# Altium PCB Feeder.PcbDoc
Units mm, origin at the board's own origin, x right, y up, seen from the top; angles counter-clockwise.
Board outline 70 x 78.74 mm, 2 copper layers (Top Layer, Bottom Layer); 132 components, 114 nets, 414 pads, 126 vias.
Unrouted connection lines stored in the file: 4.
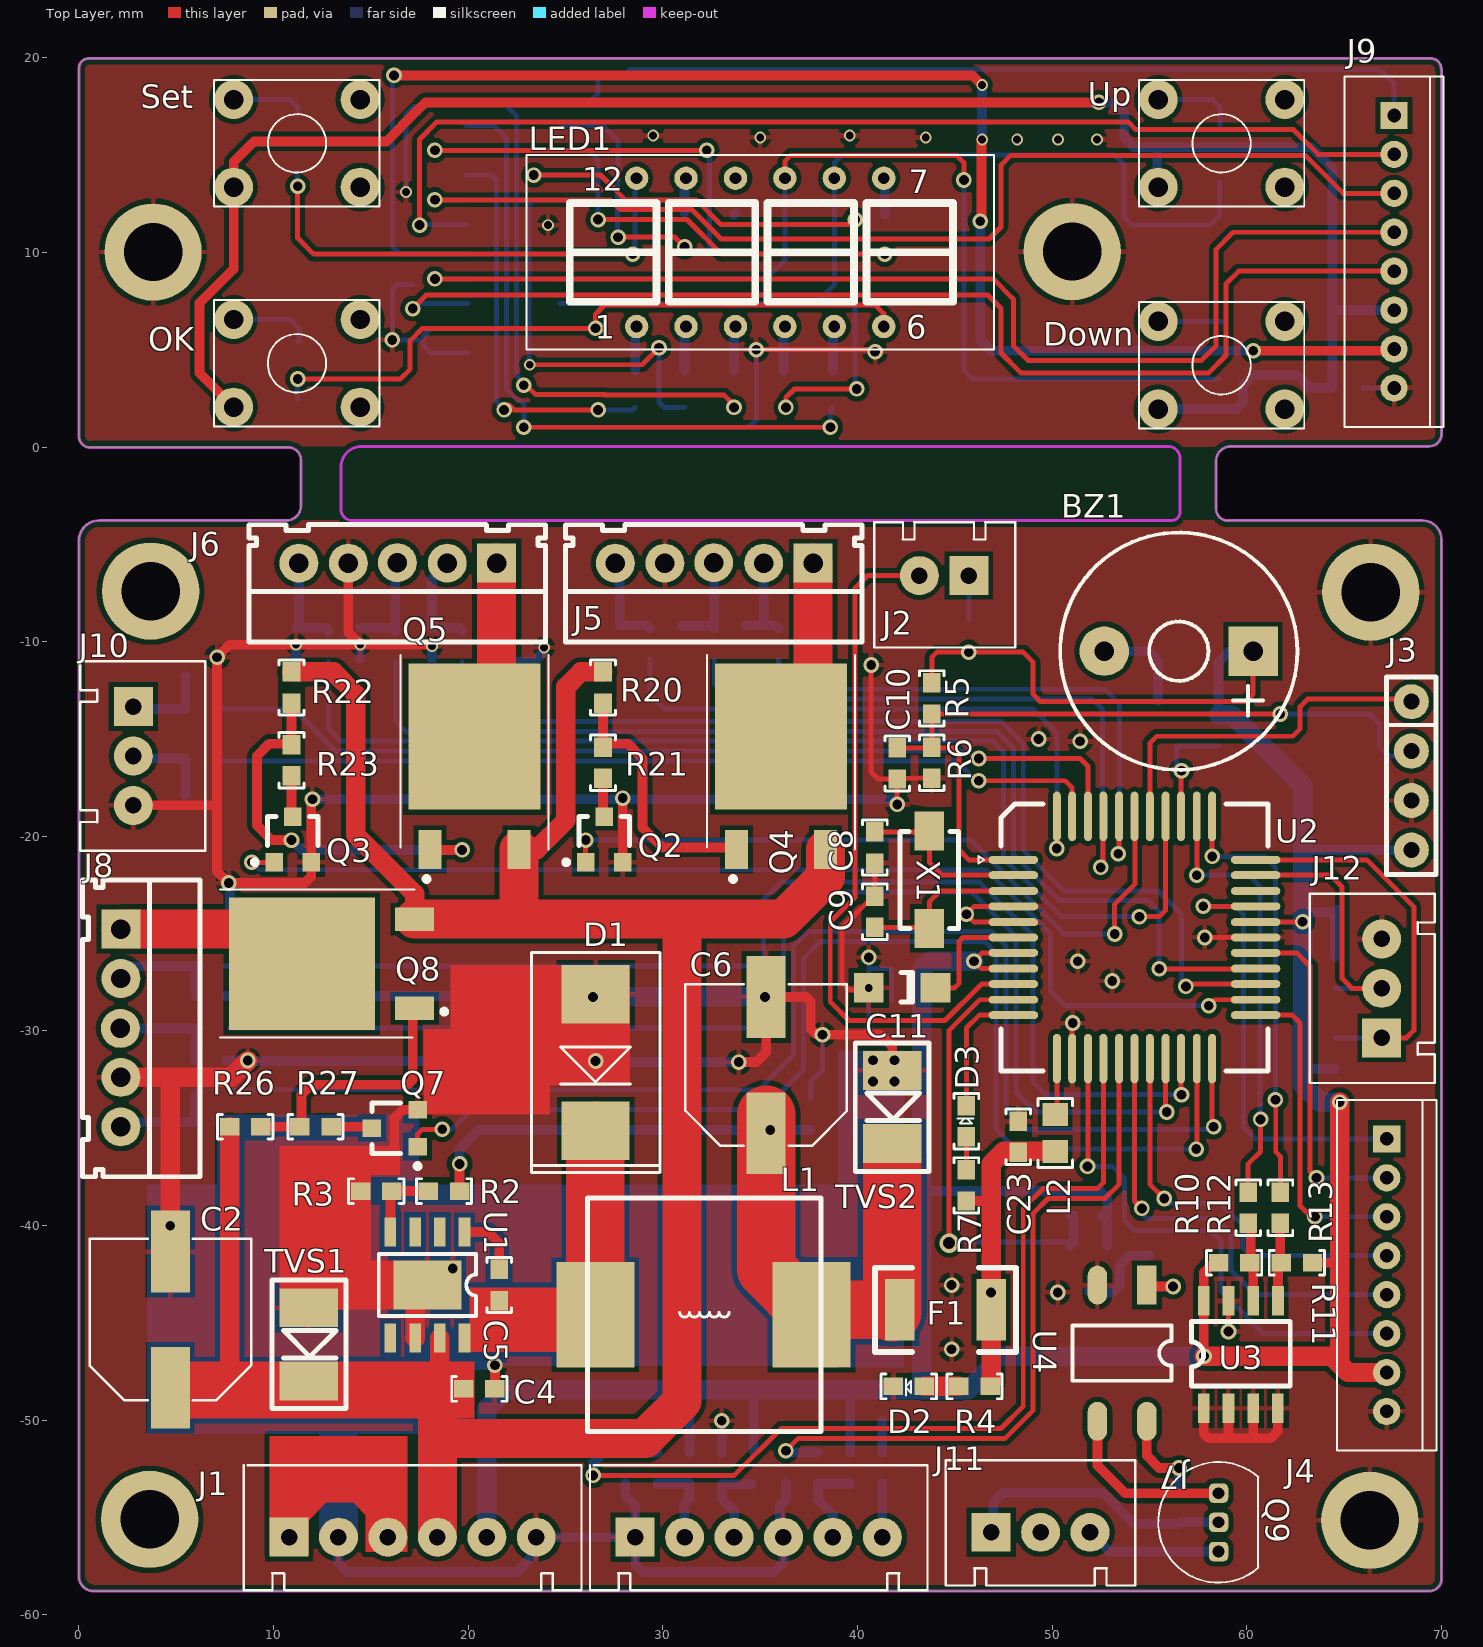
[diagram p0: Top Layer view]
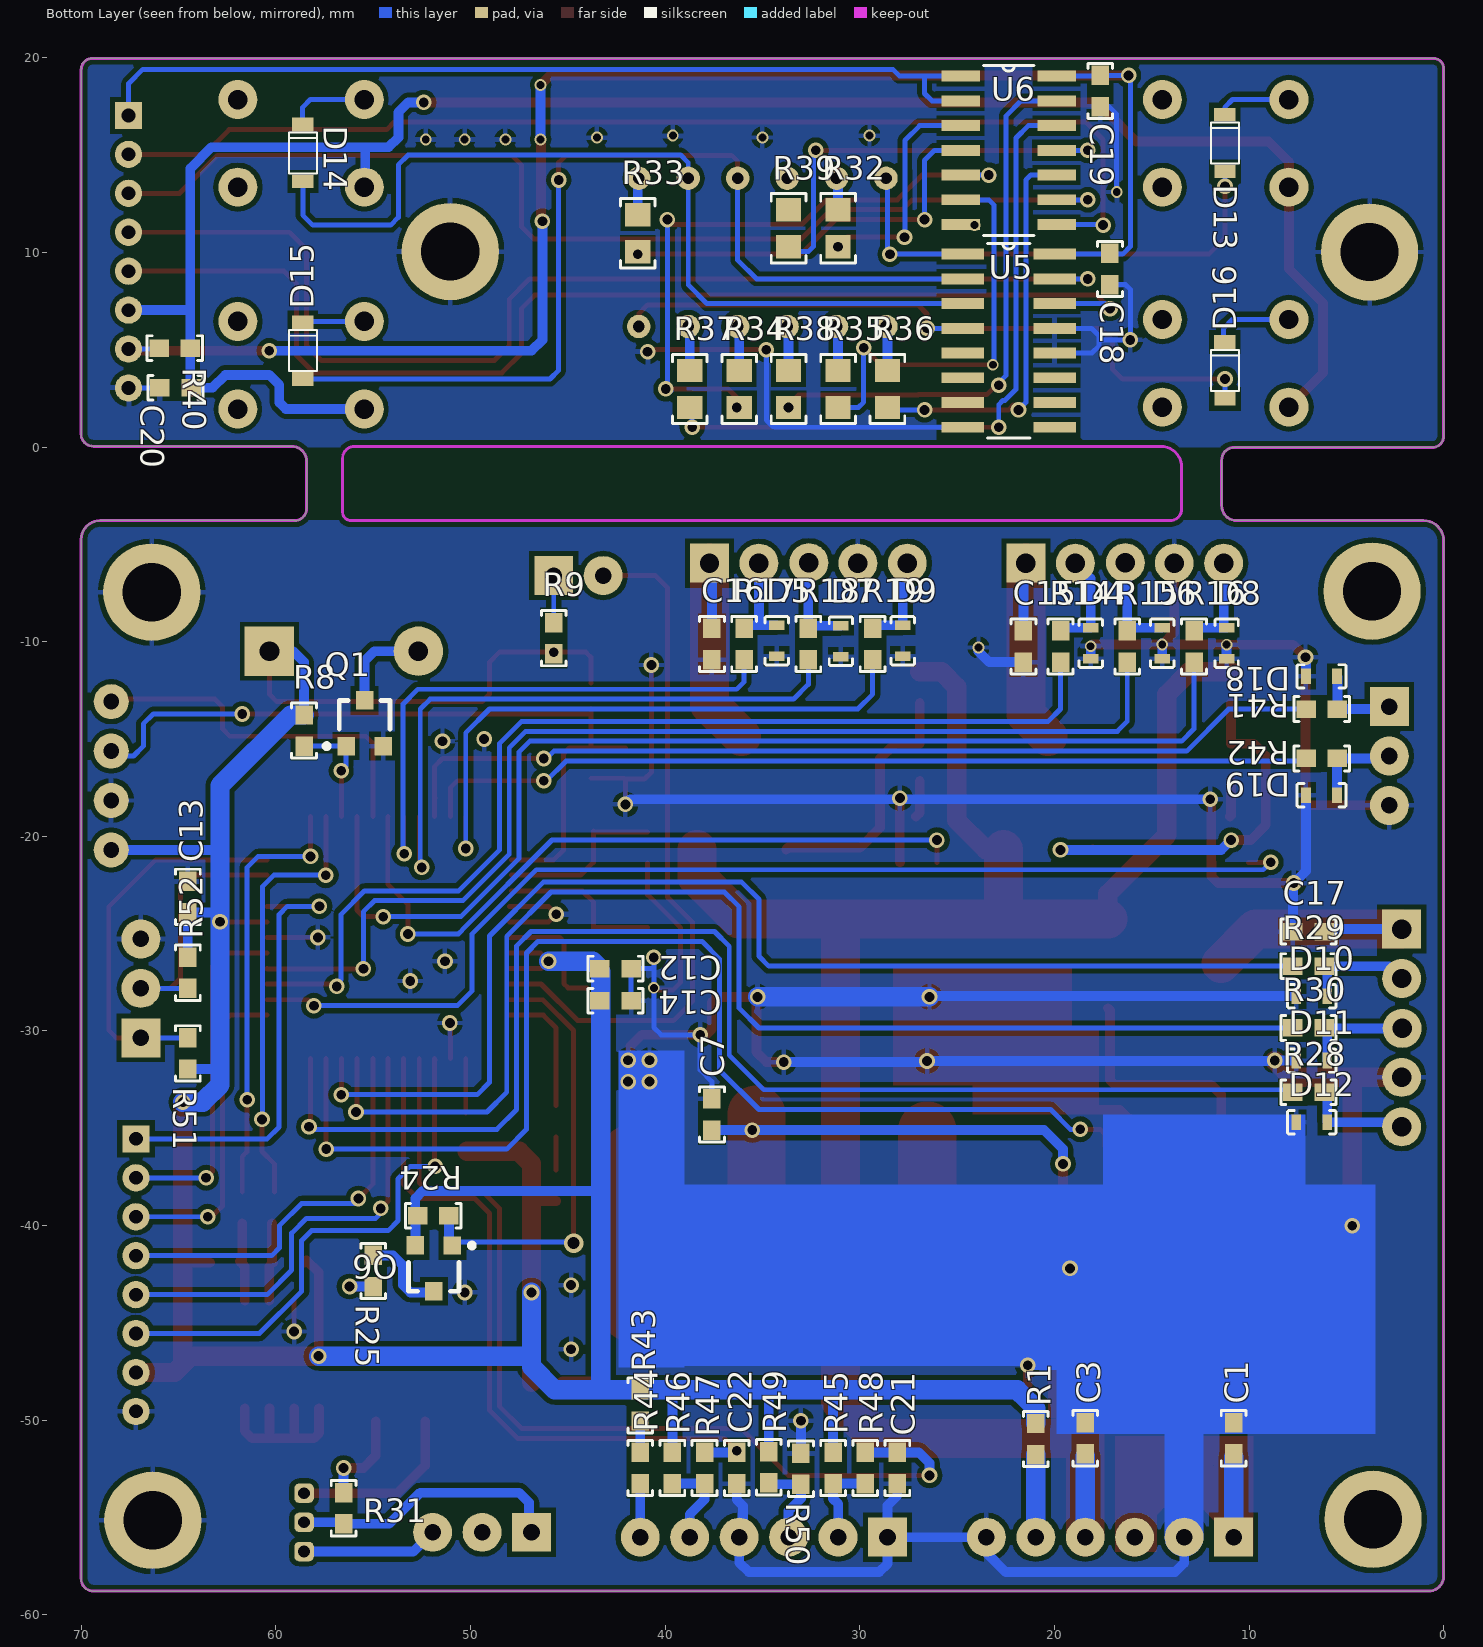
[diagram p1: Bottom Layer view, seen from below]

## Layer stack, top to bottom
Top Layer: signal copper 0.0356
Dielectric: dielectric 0.32, FR-4, Dk 4.8
Bottom Layer: signal copper 0.0356

## Board outline
0.762,-58.776 cw(c0.762,-58.014) 0,-58.014 0,-4.817 cw(c1.041,-4.817) 1.041,-3.776 10.652,-3.776 ccw(c10.652,-3.023) 11.405,-3.023 11.405,-0.66 ccw(c10.77,-0.66) 10.77,-0.025 10.719,-0.025 0.584,-0.025 cw(c0.584,0.559) 0,0.559 0,19.449 cw(c0.515,19.449) 0.515,19.964 0.737,19.964 69.367,19.964 69.444,19.964 cw(c69.444,19.406) 70.002,19.406 70.002,0.669 cw(c69.367,0.669) 69.367,0.034 59.182,0.034 ccw(c59.182,-0.728) 58.42,-0.728 58.42,-3.175 ccw(c59.03,-3.175) 59.03,-3.785 cw(c59.039,-3.785) 59.039,-3.776 69.026,-3.776 cw(c69.026,-4.75) 70,-4.75 70,-4.953 70,-58.143 cw(c69.367,-58.143) 69.367,-58.776 0.762,-58.776

## Design rules (kind name [scope] priority, off if disabled: settings)
Clearance [All] p1: gap=0.254
ComponentClearance [All] p1: gap=0.15 collisioncheckmode=3 verticalgap=0.254 showdistances=FALSE
HoleSize [All] p1: absolutevalues=TRUE maxlimit=4.5 minlimit=0.025 maxpercent=80.000 minpercent=20.000
HoleToHoleClearance [All] p1: gap=0.2 allowstackedmicrovias=TRUE
MinimumSolderMaskSliver [All] p1: minsoldermaskwidth=0.1
PolygonConnect [All] p1: connectstyle=Relief reliefconductorwidth=0.254 reliefentries=4 polygonreliefangle="90 Angle"
RoutingVias [All] p1: holewidth=0.6 width=1 viastyle="Through Hole" minholewidth=0.4 minwidth=0.6 maxholewidth=0.711 maxwidth=1.27
SilkToSilkClearance [All] p1: silktosilkclearance=0
SilkscreenOverComponentPads [All] p1: minsilkscreentomaskgap=0
SolderMaskExpansion [All] p1: expansion=0.102
Width [All] p1: maxlimit=5 minlimit=0.15 preferedwidth=0.254
22 further rules are at their usual default settings.

## Classes and differential pairs
component class Power: C1 C2 C3 C4 C5 C6 C7 D1 D2 F1 J1 L1 R1 R2 R3 R4 TVS1 TVS2 U1
component class Motor: C15 C16 C17 D4 D5 D6 D7 D8 D9 D10 D11 D12 J5 J6 J7 J8 Q2 Q3 Q4 Q5 Q6 Q7 Q8 Q9 R14 R15 R16 R17 R18 R19 R20 R21 R22 R23 R24 R25 R26 R27 R28 R29 R30 R31 U4
component class MCU: BZ1 C8 C9 C10 C11 C12 C13 C14 C23 D3 J2 J3 J4 L2 Q1 R5 R6 R7 R8 R9 R10 R11 R12 R13 U2 U3 X1
component class Display: C18 C19 C20 D13 D14 D15 D16 D17 Down J9 LED1 M1 OK R32 R33 R34 R35 R36 R37 R38 R39 R40 Set SET1 U5 U6 UP UP1
component class Communicate: C21 C22 D18 D19 J10 J11 J12 R41 R42 R43 R44 R45 R46 R47 R48 R49 R50 R51 R52

## Components (designator, comment, footprint, x,y, rotation, side; value= is the part's Value field where it differs from the comment)
BZ1 "5V" BUZZER 56.515,-10.541 r180 top
C1 "4.7uF/50V" 0603C 10.16,-52.324 r90 bottom
C2 "220uf/35V" CES-8x10R5mm 4.699,-44.831 r90 top
C3 "4.7uF/50V" 0603C 19.05,-49.53 r270 bottom
C4 "100nF/50V" 0603C 21.971,-47.752 r180 top
C5 "10nF/50V" 0603C 20.955,-41.656 r270 top
C6 "330uF/16V" "CES-8 X11R7MM" 35.306,-31.75 r90 top
C7 "100nF/50V" 0603C 38.227,-32.893 r270 bottom
C8 "22pF/50V" 0603C 40.259,-19.177 r270 top
C9 "22pF/50V" 0603C 41.529,-25.273 r90 top
C10 "100nF/50V" 0603C 42.672,-17.653 r90 top
C11 "10uF/10V" 3216 42.291,-27.813 r180 top
C12 "100nF/50V" 0603C 41.148,-26.162 r0 bottom
C13 "100nF/50V" 0603C 65.151,-21.717 r270 bottom
C14 "100nF/50V" 0603C 41.148,-27.813 r0 bottom
C15 "4.7uF/50V" 0603C 22.225,-8.852 r270 bottom
C16 "4.7uF/50V" 0603C 38.227,-8.725 r270 bottom
C17 "4.7uF/50V" 0603C 5.55,-24.257 r0 bottom
C18 "100nF/50V" 0603C 17.78,10.541 r270 bottom
C19 "100nF/50V" 0603C 18.28,19.685 r270 bottom
C20 "100nF/50V" 0603C 66.548,2.413 r180 bottom
C21 "100nF/50V" 0603C 27.432,-53.848 r90 bottom
C22 "100nF/50V" 0603C 35.687,-53.848 r90 bottom
C23 "100nF/50V" 0603C 48.895,-36.83 r90 top
D1 "B540C-13F" SMC 26.543,-31.623 r90 top
D2 "RED" 0603D 43.434,-48.26 r180 top
D3 "RED" 0603D 45.593,-35.433 r90 top
D4 "ESD5B5.0ST1G" SOD-523 18.288,-9.879 r270 bottom
D5 "ESD5B5.0ST1G" SOD-523 34.417,-9.752 r270 bottom
D6 "ESD5B5.0ST1G" SOD-523 14.605,-9.879 r270 bottom
D7 "ESD5B5.0ST1G" SOD-523 31.115,-9.779 r270 bottom
D8 "ESD5B5.0ST1G" SOD-523 11.303,-9.879 r270 bottom
D9 "ESD5B5.0ST1G" SOD-523 27.94,-9.752 r270 bottom
D10 "ESD5B5.0ST1G" SOD-523 6.577,-28.067 r0 bottom
D11 "ESD5B5.0ST1G" SOD-523 6.577,-31.369 r0 bottom
D12 "ESD5B5.0ST1G" SOD-523 6.577,-34.544 r0 bottom
D13 "4148" LL-34 11.049,15.748 r270 bottom
D14 "4148" LL-34 58.42,15.24 r270 bottom
D15 "4148" LL-34 58.42,5.08 r270 bottom
D16 "4148" LL-34 11.049,4.064 r270 bottom
D18 "ESD5B5.0ST1G" SOD-523 6.477,-11.938 r180 bottom
D19 "ESD5B5.0ST1G" SOD-523 6.477,-18.034 r180 bottom
Down "" SW6545 58.7,4.2 r0 top locked (schematic designator D17)
F1 "6V/3.5A" F1812 44.577,-44.323 r0 top
J1 "XH-6A" CN6-2.54 10.795,-56.007 r180 top locked
J2 "XH-2A" CN2-2.54 44.45,-6.604 r0 top
J3 "1*4" SIP4-2.54mm 68.453,-13.081 r270 top
J4 "XH-8A" PH2.0MM-8PIN 67.183,-42.545 r270 top
J5 "XH-5A" CN5-2.54 32.639,-5.969 r0 top
J6 "XH-5A" CN5-2.54 16.383,-5.969 r0 top
J7 "XH-3A" CN3-2.54 49.403,-55.753 r180 top
J8 "XH-5A" CN5-2.54 2.159,-29.845 r90 top
J9 "XH-8A" PH2.0MM-8PIN 67.564,10.033 r270 top
J10 "XH-3A" CN3-2.54 2.794,-15.875 r90 top
J11 "XH-6A" CN6-2.54 28.575,-56.007 r180 top
J12 "XH-3A" CN3-2.54 66.929,-27.813 r270 top
L1 "15uH,3.75A" L12*12*6 32.131,-44.577 r0 top
L2 "2.2uH" 0805L 50.165,-36.19 r90 top
LED1 "YK-2453AG, 尺寸（mm）24*10*5" DigitalTube_4W 35,10 r0 top locked
OK "" SW6545 11.2,4.3 r0 top locked (schematic designator M1)
Q1 "NPN/S8050" SOT-23 55.372,-15.367 r180 bottom
Q2 "N沟道/2N7002" SOT-23 27.051,-21.336 r0 top
Q3 "N沟道/2N7002" SOT-23 11.049,-21.336 r0 top
Q4 "PNP/B1205" TO-252 36.068,-17.78 r0 top
Q5 "PNP/B1205" TO-252 20.32,-17.78 r0 top
Q6 "PNP/S8550" SOT-23 51.943,-41.021 r0 bottom
Q7 "N沟道/2N7002" SOT-23 17.399,-34.925 r90 top
Q8 "PNP/B1205" TO-252 14.351,-26.543 r90 top
Q9 "NPN/S8050" TO-92MOD 58.547,-55.245 r270 top
R1 "4.7K" 0603R 20.955,-50.165 r270 bottom
R2 "10K" 0603R 19.558,-38.227 r180 top
R3 "3.2K" 0603R 14.478,-38.227 r0 top
R4 "4.7K" 0603R 45.212,-48.26 r0 top
R5 "1K" 0603R 43.815,-13.716 r90 top
R6 "10K" 0603R 43.815,-17.018 r90 top
R7 "1K" 0603R 45.593,-38.735 r90 top
R8 "100R" 0603R 58.547,-15.367 r90 bottom
R9 "1K" 0603R 45.72,-9.017 r270 bottom
R10 "4.7K" 0603R 58.547,-41.91 r0 top
R11 "4.7K" 0603R 63.373,-41.91 r180 top
R12 "100R" 0603R 60.071,-39.878 r90 top
R13 "100R" 0603R 61.722,-39.878 r90 top
R14 "1K" 0603R 19.685,-11.049 r90 bottom
R15 "1K" 0603R 16.256,-11.049 r90 bottom
R16 "1K" 0603R 12.827,-11.049 r90 bottom
R17 "1K" 0603R 35.941,-10.922 r90 bottom
R18 "1K" 0603R 32.639,-10.922 r90 bottom
R19 "1K" 0603R 29.337,-10.922 r90 bottom
R20 "10K" 0603R 26.924,-11.557 r270 top
R21 "3.3K" 0603R 26.924,-17.018 r90 top
R22 "10K" 0603R 10.922,-13.157 r90 top
R23 "3.3K" 0603R 10.922,-16.891 r90 top
R24 "10K" 0603R 52.705,-39.497 r180 bottom
R25 "330R" 0603R 54.991,-41.529 r270 bottom
R26 "10K" 0603R 7.747,-34.925 r0 top
R27 "3.3K" 0603R 12.954,-34.925 r180 top
R28 "1K" 0603R 7.747,-33.147 r180 bottom
R29 "1K" 0603R 7.747,-26.67 r180 bottom
R30 "1K" 0603R 7.747,-29.845 r180 bottom
R31 "1K" 0603R 56.515,-53.721 r270 bottom
R32 "150R" 0805R 31.115,10.287 r90 bottom
R33 "150R" 0805R 41.402,10.033 r90 bottom
R34 "150R" 0805R 36.195,2.032 r90 bottom
R35 "150R" 0805R 31.115,2.032 r90 bottom
R36 "150R" 0805R 28.575,2.032 r90 bottom
R37 "150R" 0805R 38.735,2.032 r90 bottom
R38 "150R" 0805R 33.655,2.032 r90 bottom
R39 "150R" 0805R 33.655,10.287 r90 bottom
R40 "5.6K" 0603R 64.389,5.08 r0 bottom
R41 "100R" 0603R 5.461,-13.462 r0 bottom
R42 "100R" 0603R 5.461,-16.002 r0 bottom
R43 "100R" 0603R 41.275,-50.038 r90 bottom
R44 "120R" 0603R 41.275,-53.251 r90 bottom
R45 "4.7K" 0603R 31.369,-53.251 r90 bottom
R46 "4.7K" 0603R 39.624,-53.251 r90 bottom
R47 "1K" 0603R 37.973,-53.251 r90 bottom
R48 "1K" 0603R 29.718,-53.251 r90 bottom
R49 "330R" 0603R 34.671,-53.213 r90 bottom
R50 "1K" 0603R 33.02,-51.689 r270 bottom
R51 "4.7K" 0603R 64.516,-30.353 r270 bottom
R52 "4.7K" 0603R 64.516,-27.813 r90 bottom
Set "" SW6545 11.2,15.6 r0 top locked (schematic designator SET1)
TVS1 "1SMA26CAT3G" DO-214AC 11.811,-46.101 r90 top
TVS2 "1SMA6.0AT3D" DO-214AC 41.783,-33.909 r90 top
U1 "TPS5450" SOIC8-P 17.907,-43.053 r270 top
U2 "STM8S105S4" LQFP44 48.006,-21.209 r90 top locked
U3 "AT24C02N" SOP8 59.69,-46.609 r90 top
U4 "TLP181" SOP4-2.54 53.594,-46.482 r270 top
U5 "74LS145" SO-16 22.352,5.461 r180 bottom
U6 "74HC164" SO-14 22.352,15.24 r180 bottom
Up "" SW6545 58.7,15.6 r0 top locked (schematic designator UP1)
X1 "16.000MHZ" CRYL3*5 43.688,-22.225 r90 top

## Footprints (in the part's own frame and the unit in brackets; to place one, negate y for a bottom-side part, rotate by r counter-clockwise, add the part's x,y. Pads: shape width x height; smd on the part's side, far side on the other; paste and mask are expansions set on the pad)
0603C [mm]
  rect 1x0.9 smd: 1(0.597,0.635) 2(2.197,0.635)
  silkscreen extent -0.02,0 2.82,1.27
0603D [mm]
  rect 1x0.9 smd: 1(0,0) 2(1.6,0)
  silkscreen extent -0.62,-0.64 2.22,0.64
0603R [mm]
  rect 1x0.9 smd: 1(0,0) 2(1.6,0)
  silkscreen extent -0.62,-0.64 2.22,0.64
0805L [mm]
  rect 1.2x1.3 smd: 1(0,0) 2(1.9,0)
  silkscreen extent -0.83,-0.89 2.73,0.89
0805R [mm]
  rect 1.2x1.3 smd: 1(0,0) 2(1.9,0)
  silkscreen extent -0.83,-0.89 2.73,0.89
3216 [mil] "贴片钽电容"
  rect 60x60 smd: 1(-67.5,-1) 2(67.5,-1)
  silkscreen extent -21,-32 3,27
BUZZER [mil]
  rect 100x100 hole 40: 1(-150,-2)
  round 100 hole 40: 2(151.18,-2)
  silkscreen extent -240,-242 240,238
"CES-8 X11R7MM" [mm] "CES-8 X11R7MM"
  rect 4.2x2 smd: 1(-3.5,0) 2(3.5,0)
  silkscreen extent -4.15,-4.15 4.15,4.15
CES-8x10R5mm [mm] "CES-8X10R5MM"
  rect 4.2x2 smd: 1(-3.5,0) 2(3.5,0)
  silkscreen extent -4.15,-4.15 4.15,4.15
CN2-2.54 [mm]
  rect 2x2 hole 0.85: 1(1.27,0)
  round 2 hole 0.85: 2(-1.27,0)
  silkscreen extent -3.59,-3.7 3.65,2.73
CN3-2.54 [mm]
  rect 2x2 hole 0.85: 1(2.54,0)
  round 2 hole 0.85: 2(0,0) 3(-2.54,0)
  silkscreen extent -4.86,-3.7 4.86,2.73
CN5-2.54 [mm]
  rect 2x2 hole 1: 1(5.08,0)
  round 2 hole 1: 2(2.54,0) 3(-0.025,0.025) 4(-2.54,0) 5(-5.08,0)
  silkscreen extent -7.65,-4.05 7.59,1.98
CN6-2.54 [mm]
  rect 2x2 hole 0.85: 1(0,0)
  round 2 hole 0.85: 2(-2.54,0) 3(-5.08,0) 4(-7.62,0) 5(-10.16,0) 6(-12.7,0)
  silkscreen extent -15.02,-3.7 2.32,2.73
CRYL3*5 [mm]
  rect 2x1.5 smd: 1(-2.5,0) 2(2.5,0)
  silkscreen extent -2.52,-1.5 2.48,1.51
DigitalTube_4W [mm] "0.25英寸，4位时钟数码管"
  round 1.2 hole 0.6: 1(-6.35,-3.81) 2(-3.81,-3.81) 3(-1.27,-3.81) 4(1.27,-3.81) 5(3.81,-3.81) 6(6.35,-3.81) 7(6.35,3.81) 8(3.81,3.81) 9(1.27,3.81) 10(-1.27,3.81) 11(-3.81,3.81) 12(-6.35,3.81)
  silkscreen extent -12,-5 12,5
DO-214AC [mm] "DO-214AC"
  rect 2x3 smd: 1(1.88,0) 2(-1.88,0)
  silkscreen extent -3.3,-1.9 3.3,1.9
F1812 [mil]
  rect 60x125 smd: 1(-95,0) 2(90,0)
  silkscreen extent -145,-85 140,85
L12*12*6 [mm] "L12*12*6"
  rect 4x5.4 smd: 1(-5.6,0) 2(5.5,0)
  silkscreen extent -6,-6 6,6
LL-34 [mm]
  rect 0.7x1.1 smd: 1(-1.329,-0.198) 2(1.589,-0.188)
  silkscreen extent -0.92,-0.91 1.18,0.54
LQFP44 [mil]
  oval 16x100 smd: 1(0,0) 2(-31,0) 3(-63,0) 4(-94,0) 5(-126,0) 6(-157,0) 7(-188,0) 8(-220,0) 9(-251,0) 10(-283,0) 11(-314,0) 23(-314,-490) 24(-283,-490) 25(-251,-490) 26(-220,-490) 27(-188,-490) 28(-157,-490) 29(-126,-490) 30(-94,-490) 31(-63,-490) 32(-31,-490) 33(0,-490)
  oval 100x16 smd: 12(-402,-88) 13(-402,-119) 14(-402,-151) 15(-402,-182) 16(-402,-214) 17(-402,-245) 18(-402,-276) 19(-402,-308) 20(-402,-339) 21(-402,-371) 22(-402,-402) 34(88,-402) 35(88,-371) 36(88,-339) 37(88,-308) 38(88,-276) 39(88,-245) 40(88,-214) 41(88,-182) 42(88,-151) 43(88,-119) 44(88,-88)
  silkscreen extent -427,-515 113,71
PH2.0MM-8PIN [mm] "2.0mm带锁HY-8A"
  rect 1.4x1.4 hole 0.7: 1(-7,0)
  round 1.4 hole 0.7: 2(-5,0) 3(-3,0) 4(-1,0) 5(1,0) 6(3,0) 7(5,0) 8(7,0)
  silkscreen extent -9,-2.55 9,2.55
SIP4-2.54mm [mm]
  round 1.8 hole 0.813: 1(0,0) 2(2.54,0) 3(5.08,0) 4(7.62,0)
  silkscreen extent -1.27,-1.27 8.89,1.27
SMC [mm] "SMC"
  rect 3x3.5 smd: 1(3.5,0) 2(-3.5,0)
  silkscreen extent -5.65,-3.3 5.65,3.3
SO-14 [mil]
  rect 78x22 smd: 1(-97,150) 2(-97,100) 3(-97,50) 4(-97,0) 5(-97,-50) 6(-97,-100) 7(-97,-150) 8(97,-150) 9(97,-100) 10(97,-50) 11(97,0) 12(97,50) 13(97,100) 14(97,150)
  silkscreen extent -51,-172 51,172, body extent -121,-172 123,172, height 69
SO-16 [mil]
  rect 86x22 smd: 1(-93,175) 2(-93,125) 3(-93,75) 4(-93,25) 5(-93,-25) 6(-93,-75) 7(-93,-125) 8(-93,-175) 9(93,-175) 10(93,-125) 11(93,-75) 12(93,-25) 13(93,25) 14(93,75) 15(93,125) 16(93,175)
  silkscreen extent -43,-197 43,197, body extent -123,-199 121,195, height 69
SOD-523 [mm]
  rect 0.5x0.8 smd: 1(-0.6,0.15) 2(1,0.15)
  silkscreen extent -1.05,-0.45 1.45,0.75
SOIC8-P [mm] "Thermol Pad"
  rect 1.5x0.6 smd: 1(-2.725,1.905) 2(-2.725,0.635) 3(-2.725,-0.635) 4(-2.725,-1.905) 5(2.725,-1.905) 6(2.725,-0.635) 7(2.725,0.635) 8(2.725,1.905)
  rect 2.5x3.5 smd: 9(0,0)
  silkscreen extent -1.6,-2.5 1.6,2.5
SOP4-2.54 [mm] "引脚中心距100mil"
  rect 2x1 smd: 1(-3.429,1.27)
  oval 2x1 smd: 2(-3.429,-1.27) 3(3.571,-1.27) 4(3.571,1.27)
  silkscreen extent -1.34,-2.54 1.49,2.54
SOP8 [mm] "body:6mm"
  rect 1.5x0.6 smd: 1(-2.774,1.905) 2(-2.774,0.635) 3(-2.774,-0.635) 4(-2.774,-1.905) 5(2.75,-1.91) 6(2.75,-0.64) 7(2.75,0.63) 8(2.75,1.9)
  silkscreen extent -1.63,-2.54 1.68,2.54
SOT-23 [mm]
  rect 0.9x0.95 smd: 1(-1.016,0) 2(0.884,0) 3(-0.066,2.35)
  silkscreen extent -2.14,-0.12 1.23,2.35
SW6545 [mm] "按键"
  round 2 hole 1: 1(-3.25,-2.25) 2(-3.25,2.25) 3(3.25,-2.25) 4(3.25,2.25)
  silkscreen extent -4.25,-3.25 4.25,3.25
TO-92MOD [mm]
  rrect50% 1x1 hole 0.6: 1(-1.5,0) 2(1.5,0) 3(0,0)
  silkscreen extent -3.1,-3.1 3.1,2.04
TO-252 [mm]
  rect 1.2x2 smd: 1(-2.286,-2.9) 3(2.286,-2.9)
  rect 6.8x7.5 smd: 2(0,2.9)
  silkscreen extent -3.8,-4.54 3.8,7.1

## Part data
BZ1: library part BEEP-5V, "Ф11.8*9.5，DC5V"
C1 C3 C15 C16 C17: library part C4.7uF-0603, "瓷片电容,4.7uF,5%,X7R,50V,0603"
C2: library part C220uf/35V-8*11.5, "铝电解电容,220uF,20%,35V,8*11.5"
C4 C7 C10 C12 C13 C14 C18 C19 C20 C21 C22 C23: library part C100nF/50V-0603, "瓷片电容,100nF,5%,X7R,50V,0603"
C5: library part C10nF/50V-0603, "瓷片电容,10nF,5%,X7R,50V,0603"
C6: library part C330uF/16V-8*11.7, "铝电解电容，330uF/16V，8*11.7"
C8 C9: library part C22pF/50V-0603, "瓷片电容,22pF,5%,X7R,50V,0603"
C11: library part C10uF/10V-A, "钽电容,10uF,10%,10V,3216(A)"
D1: library part B540C-13-F, "肖特基二极管, 40V/5A, SMC（DO-214AB）封装"
D2 D3: library part LED-RED-0603, "LED，红光，0603"
D4 D5 D6 D7 D8 D9 D10 D11 D12 D18 D19: "TVS管,5V,SOD-523"
D13 D14 D15 D16: library part DIODE, "Diode"
Down OK Set Up: library part SW-PB
F1: library part F-6V/3.5A, "保险丝,6V,3.5A,慢断,1812封装"
J1 J11: library part CONN-XH-6A, "CONN,XH-6A,6PIN,2.54mm插座"
J2: library part CONN-XH-2A, "CONN,XH-2A,2PIN,2.54mm插座"
J3: library part SIP1*4-FM, "单排母，1*4,2.54mm"
J4 J9: library part CONN-XH-8A, "CONN,XH-8A,8PIN,2.54mm插座"
J5 J6 J8: library part CONN-XH-5A, "CONN,XH-5A,5PIN,2.54mm插座"
J7 J10 J12: library part CONN-XH-3A, "CONN,XH-3A,3PIN,2.54mm插座"
L1: library part L15uH-12*12*6, "744771115，15uH，±20%，3.75A，外形尺寸：12x12x6mm"
L2: library part L2.2uH-0805, "磁珠,2.2uH,0805"
LED1: library part 数码管，红色，共阴，尺寸（mm）24*10*5, "数码管，红色，共阴，尺寸（mm）24*10*5"
Q1 Q9: library part S8050, "NPN型三极管，S8050，SOT－23"
Q2 Q3 Q7: library part 2N7002, "N沟道场效应管，2N7002，SOT-23"
Q4 Q5 Q8: library part B1205, "PNP型三极管，B1205，SOT－23"
Q6: library part S8550, "PNP型三极管，S8550，SOT－23"
R1 R4 R10 R11 R45 R46 R51 R52: library part R4.7K-0603, "金属膜电阻,4.7K,1%,1/10W,0603"
R2: library part R10K-0603-0.1%, "金属膜电阻,10K,0.1%,1/10W,0603"
R3: library part R3.2K-0603-0.1%, "金属膜电阻,3.2KK,0.1%,1/10W,0603"
R5 R7 R9 R14 R15 R16 R17 R18 R19 R28 R29 R30 R31 R47 R48 R50: library part R1K-0603, "金属膜电阻,1K,1%,1/10W,0603"
R6 R20 R22 R24 R26: library part R10K-0603, "金属膜电阻,10K,1%,1/10W,0603"
R8 R12 R13 R41 R42 R43: library part R100R-0603, "金属膜电阻,100R,1%,1/10W,0603"
R21 R23 R27: library part R3.3K-0603, "金属膜电阻,3.3K,1%,1/10W,0603"
R25: library part R33R-0805, "金属膜电阻,330R,1%,1/10W,0603"
R32 R33 R34 R35 R36 R37 R38 R39: library part R150R-0805, "金属膜电阻,150R,1%,1/8W,0805"
R40: library part RES2
R44: library part R120R, "金属膜电阻,120R,5W,5%"
R49: library part R330R-0603, "金属膜电阻,330R,1%,1/10W,0603"
TVS1: "TVS管，1SMA26CAT3G，DO214AC封装（SMA）"
TVS2: "TVS管，1SMA6.0AT3D，DO214AC封装（SMA）"
U1: "线性稳压器，SOIC-8封装，"
U2: "MCU，STM8S105S4，LQFP44"
U3: "IC，AT24C02N，SOP8"
U4: "光耦，TLP181，SOP4"
U5: library part 74LS595
U6: library part 74LS164, "74LS164"
X1: library part CRYSTAL, "无源晶振，16.000MHZ，贴片2脚，5.0*3.2*1.2"

## Free pads (board coordinates)
  round 5 hole 3: 0(3.632,-55.093) 0(3.683,-7.408) 0(3.81,10.017) 0(51.029,10.042) 0(66.317,-55.143) 0(66.368,-7.459)

## Via types
v1: diameter 0.8, hole 0.5, Top Layer to Bottom Layer, 108 vias
v2: diameter 0.6, hole 0.4, Top Layer to Bottom Layer, 17 vias
v3: diameter 1, hole 0.6, Top Layer to Bottom Layer, 1 vias

## Nets (pads, with @x,y where several pads share a name; then routed paths per layer and width w, separated by ;. In a path a pad name is that pad's centre, name@x,y a point inside that pad or via, vN(x,y) a via of type N, cw(c..) or ccw(c..) an arc to the next point about the centre after c; other vN are vias at no path point)
#NRST: C10.2 J3.2 R5.1 R6.2 U2.1 | length 39.4
  Top Layer w0.254: C10.2 R6.2@43.777,-15.456 ; R5.1@43.815,-13.462 R5.1 ; U2.1@47.879,-21.209 45.72,-21.209 45.212,-20.701 45.212,-15.748 44.92,-15.456 R6.2@43.777,-15.456 ; v1(61.722,-13.716) R5.1 ; R6.2@43.777,-15.456 R6.2 R5.1
  Bottom Layer w0.254: v1(61.722,-13.716) 66.294,-13.716 66.802,-14.224 66.802,-15.367 67.31,-15.875 68.199,-15.875 J3.2
+5V: BZ1.1 C12.2 C13.2 C14.2 C23.1 F1.2 J3.4 J4.7 L2.1 Q6.2 R1.1 R4.2 R5.2 R7.1 R8.2 R9.2 R10.1 R11.1 R24.1 R43.2 R45.2 R46.2 R49.2 R51.2 R52.2 U2.7 U2.8 U2.29 U3.8 | length 202.5
  Top Layer w0.254: R5.2 43.815,-10.795 44.069,-10.541 v1@45.593,-10.541 ; v1(45.72,-10.541) 48.514,-10.541 49.022,-11.049 49.022,-12.7 49.403,-13.081 59.944,-13.081 60.325,-12.7 BZ1.1 ; v1@45.979,-26.411 46.406,-25.984 U2.7 ; v1(45.983,-26.416) 46.364,-26.797 U2.8 ; U2.29 v1@62.865,-24.409
  Top Layer w0.5: R7.1 46.863,-38.735 ; 57.79,-45.207 U3.8 ; v1(57.8,-46.7) 57.79,-46.69 U3.8 ; R10.1 58.42,-41.783 57.79,-42.413 U3.8 ; R11.1 64.643,-41.91
  Top Layer w1: R4.2@46.863,-48.057 F1.2@46.863,-45.339 ; v1(46.863,-43.434) 46.863,-38.735 46.863,-36.83 47.503,-36.19 L2.1 ; v1(57.8,-46.7) 64.353,-46.7 64.77,-47.117 ; v1(64.77,-33.655) 64.77,-47.117 ; J4.7 65.198,-47.545 64.77,-47.117
  Bottom Layer w0.254: 45.602,-26.797 v1(45.983,-26.416)
  Bottom Layer w0.5: 31.242,-48.438 31.369,-48.565 R45.2 ; R49.2 34.671,-48.565 ; R46.2 39.624,-48.565 ; 43.434,-38.227 52.451,-38.227 52.832,-38.608 52.832,-39.37 R24.1 ; R24.1@52.578,-39.497 52.827,-39.746 Q6.2 ; R8.2 58.547,-11.049 59.106,-10.49 BZ1.1 BZ1.1@60.274,-10.541 ; 62.903,-23.914 C13.2 ; 62.992,-20.701 J3.4 J3.4@68.326,-20.574 ; 63.068,-31.953 R51.2 ; R52.2 C13.2 ; C13.2@64.661,-23.769 C13.2
  Bottom Layer w1: R1.1 20.955,-49.403 21.729,-48.629 21.92,-48.438 31.242,-48.438 R43.2 43.307,-48.438 ; C12.2@43.307,-26.962 43.307,-48.438 ; C12.2 43.726,-26.416 v1(45.983,-26.416) ; v1(46.863,-43.434) 46.863,-46.5 ; v1(57.8,-46.7) 47.063,-46.7 46.863,-46.5 ; R8.2 59.233,-13.767 62.865,-17.399 v1(62.865,-24.384) 62.865,-32.766 63.754,-33.655 v1(64.77,-33.655) ; 43.307,-48.438 45.669,-48.438 46.863,-47.244 46.863,-46.5
A: LED1.11 R32.2 | length 1.8
  Bottom Layer w0.5: R32.2@31.115,12.06 31.115,13.735 LED1.11
A0: J4.4 U2.18 | length 21
  Top Layer w0.254: U2.18 55.016,-37.871 v1(55.753,-38.608)
  Bottom Layer w0.254: v1@55.753,-38.862 v1@55.88,-38.862 ; J4.4 60.214,-41.545 59.817,-41.148 59.817,-40.005 58.674,-38.862 v1@56.007,-38.862 ; v1@55.88,-38.862 56.007,-38.735 v1@56.007,-38.862 ; v1@55.88,-38.862 v1@56.007,-38.862
A1: J4.5 U2.17 | length 24
  Top Layer w0.254: U2.17 54.229,-38.735 v1(54.61,-39.116)
  Bottom Layer w0.254: v1@54.61,-39.243 v1(54.61,-39.116) 54.356,-39.116 54.864,-39.624 58.42,-39.624 59.182,-40.386 59.182,-42.282 60.445,-43.545 J4.5
ASK: J12.2 R52.1 U2.32 | length 14.1
  Top Layer w0.254: U2.32 64.287,-21.996 64.897,-22.606 64.897,-27.305 65.405,-27.813 J12.2
  Bottom Layer w0.254: R52.1 J12.2
B: LED1.7 R33.2 | length 1.9
  Bottom Layer w0.5: LED1.7 41.402,13.758 R33.2
BEEP: Q1.1 R8.1 U2.36 | length 5.9
  Top Layer w0.254: U2.36 v1@56.617,-16.637
  Bottom Layer w0.254: v1(56.642,-16.637) 56.388,-16.383 Q1.1 R8.1
BUTTON: J12.1 R51.1 U2.33 | length 19.7
  Top Layer w0.254: U2.33 66.167,-21.209 68.58,-23.622 68.58,-29.972 68.199,-30.353 J12.1
  Bottom Layer w0.254: R51.1 J12.1
C: LED1.4 R34.2 | length 2.2
  Bottom Layer w0.5: R34.2 LED1.4@36.195,6.115
D: LED1.2 R35.2 | length 2.3
  Bottom Layer w0.5: R35.2 31.115,6.115 LED1.2
DIR_ROLLER: R28.1 U2.22 | length 70.2
  Top Layer w0.254: U2.22 58.217,-35.001 v1(58.293,-34.925)
  Bottom Layer w0.254: R28.1 7.747,-33.02 34.925,-33.02 36.703,-31.242 36.703,-25.654 37.465,-24.892 46.892,-24.892 47.625,-25.625 47.625,-34.036 48.641,-35.052 58.166,-35.052 v1(58.293,-34.925)
DIR_TURN: R19.1 U2.44 | length 31.2
  Top Layer w0.254: v1@50.165,-20.701 v1(50.241,-20.625) U2.44
  Bottom Layer w0.254: R19.1 29.337,-12.7 30.099,-13.462 49.022,-13.462 50.241,-14.681 v1(50.241,-20.625)
DIR_VIBRA: R16.1 U2.37 | length 58.6
  Top Layer w0.254: v1(54.483,-24.13) 55.499,-24.13 55.829,-23.8 U2.37
  Bottom Layer w0.254: R16.1 12.827,-14.478 13.462,-15.113 46.95,-15.113 47.498,-15.661 47.498,-21.135 50.493,-24.13 v1(54.483,-24.13)
E: LED1.1 R36.2 | length 2.3
  Bottom Layer w0.5: R36.2 28.575,6.115 LED1.1
F: LED1.10 R39.2 | length 0.1
  Bottom Layer w0.5: R39.2@33.655,11.933 R39.2@33.73,12.008
FG_ROLLER: R29.1 U2.20 | length 63.4
  Top Layer w0.254: U2.20 56.617,-33.249 v1(56.642,-33.274)
  Bottom Layer w0.254: R29.1@7.493,-26.67 R29.1 34.671,-26.67 35.179,-26.162 35.179,-23.241 36.068,-22.352 46.252,-22.352 49.022,-25.122 49.022,-32.639 49.657,-33.274 v1(56.642,-33.274)
FG_TURN: R17.1 U2.40 | length 29.5
  Top Layer w0.254: v1(53.4,-20.9) 53.4,-21.015 53.442,-21.057 U2.40
  Bottom Layer w0.254: R17.1 35.941,-12.065 36.322,-12.446 47.879,-12.446 52.705,-12.446 53.467,-13.208 53.467,-21.082 53.4,-21.015 v1(53.4,-20.9)
FG_VIBRA: R14.1 U2.25 | length 54.2
  Top Layer w0.254: v1@56.871,-27.584 U2.25
  Bottom Layer w0.254: R14.1 19.685,-13.462 20.32,-14.097 47.371,-14.097 48.514,-15.24 48.514,-20.714 50.6,-22.8 55.439,-22.8 56.642,-24.003 56.642,-27.356 v1@56.871,-27.584
  other v1: 56.871,-27.711
G: LED1.5 R37.2 | length 2.3
  Bottom Layer w0.5: R37.2 38.735,6.115 LED1.5
GATE: C22.2 R47.2 U2.16 | length 36.8
  Top Layer w0.254: v1(36.322,-51.562) 36.957,-50.927 47.581,-50.927 49.022,-49.486 49.022,-39.37 49.784,-38.608 52.705,-38.608 53.442,-37.871 U2.16
  Bottom Layer w0.5: C22.2 R47.2
GND: C1.2 C2.2 C3.1 C4.1 C6.2 C7.1 C8.2 C9.2 C10.1 C11.2 C12.1 C13.1 C14.1 C15.2 C16.2 C17.2 C18.2 C19.2 C20.1 C21.1 C22.1 C23.2 D1.1 D2.2 D4.2 D5.2 D6.2 D7.2 D8.2 D9.2 D10.2 D11.2 D12.2 D18.1 D19.1 J1.2 J1.6 J3.3 J4.8 J5.4 J6.4 J8.4 J9.8 J10.3 J11.1 J11.4 J12.3 pad.0@3.81,10.017 pad.0@51.029,10.042 pad.0@66.317,-55.143 pad.0@66.368,-7.459 Q1.2 Q2.2 Q3.2 Q7.2 R3.1 R6.1 R50.1 TVS1.1 TVS2.1 U1.6 U1.9 U2.4 U2.5 U2.13 U2.28 U3.1 U3.2 U3.3 U3.4 U3.7 U4.2 U5.8 U5.12 U5.13 U6.7 | length 345.1
  Top Layer w0.254: v1(34.8,5) 40.8,5 v1(40.9,4.9) v1@40.9,5 ; v2(40.576,-27.788) 40.464,-27.9 39.6,-27.9 39.2,-27.5 39.2,-24.7 40.894,-23.006 C8.2 ; v1(40.7,-11.2) 40.7,-16.7 41.056,-17.056 C10.1 ; v1(42.037,-18.363) C10.1 ; R6.1 42.075,-17.018 C10.1 ; v1@45.466,-24.003 v1(45.593,-24.003) ; U2.5 45.999,-24.409 v1(45.593,-24.003) ; U2.4 45.999,-23.597 v1(45.593,-24.003) ; v1@50.927,-29.337 51.054,-29.464 v1(51.054,-29.591) 51.029,-29.616 U2.13 ; v1@57.785,-25.146 v1(57.836,-25.197) U2.28 ; v1(59.06,-45.44) U3.7
  Top Layer w0.5: J10.3 2.979,-18.6 3.179,-18.4 7.1,-18.4 ; v1@11.9,-18.1 v1(12,-18.1) 11.937,-18.163 11.937,-21.332 Q3.2 11.933,-22.067 11.6,-22.4 v1(7.7,-22.4) 7.1,-21.8 7.1,-18.4 ; TVS1.1@12.6,-43.432 12.6,-38.6 12.973,-38.227 R3.1 14.478,-37.022 14.9,-36.6 15.9,-36.6 16.2,-36.3 16.2,-34.5 16.659,-34.041 Q7.2 22.459,-34.041 23,-33.5 23,-28.6 23.35,-28.25 v1(26.416,-28.25) 26.543,-28.25 v1(26.543,-31.543) ; J6.4 13.843,-9.533 v2(14.455,-10.145) ; v2(18.138,-10.238) 18.045,-10.145 v2(14.455,-10.145) ; C4.1 v1(21.374,-47.174) ; Q2.2 27.939,-21.332 v1@27.939,-18.039 ; v1(33.9,-31.6) 34.8,-31.6 35.306,-31.094 C6.2 ; v1(35.25,-28.25) C6.2 ; TVS2.1 41.783,-30.783 41.2,-30.2 v1(38.2,-30.2) 37.9,-30.2 37.6,-29.9 37.6,-28.5 37.35,-28.25 C6.2 ; U3.1 57.785,-50.673 58.039,-50.927 59.055,-50.927 ; U3.2 59.055,-50.927 ; U3.3 60.325,-50.8 60.198,-50.927 ; U3.4 61.595,-50.546 61.214,-50.927 60.198,-50.927 ; 7.1,-18.4 v1(7.1,-10.8) 7.747,-10.153 v2(11.153,-10.153) 11.161,-10.145 v2(14.455,-10.145) ; 59.055,-50.927 60.198,-50.927
  Top Layer w1: J8.4 J8.4 7.815,-32.385 v1(8.681,-31.519) ; C2.2 v1(4.699,-40) 4.699,-32.386 ; U1.6 U1.9@17.272,-43.9
  Bottom Layer w0.254: v2(16.8,13.1) 16.8,17.1 17.188,17.488 C19.2 ; C18.2 16.344,8.344 16.1,8.1 v1(16.1,5.5) 17.7,5.5 ; U5.12 18.074,4.826 17.7,5.2 17.7,5.5 ; U5.13 18.096,6.096 17.7,5.7 17.7,5.5 ; U5.8 34.365,1.016 34.4,1.051 34.463,1.051 34.8,1.388 v1(34.8,5) ; C7.1 37.6,-33.482 37.6,-32.6 38.2,-32 v1(38.2,-30.2) 40.2,-30.2 40.576,-29.824 v2(40.576,-27.788) 40.576,-26.124 v1@40.6,-26.1 ; 40.579,-26.797 C12.1 C14.1 ; C20.1 ccw(c65.966,3.048) 65.966,3.033 J9.8
  Bottom Layer w0.5: D19.1 7.077,-21.777 v1(7.7,-22.4) 7.8,-22.4 7.747,-22.453 C17.2 ; D18.1 v1@7.077,-11.123 ; D11.2 v1(8.681,-31.519) ; D10.2@7.577,-28.2 v1@26.366,-28.2 ; v1@8.705,-31.543 v1(26.543,-31.543) ; D8.2 v2(11.153,-10.153) ; v1(12,-18.1) 41.774,-18.1 v1(42.037,-18.363) ; J1.2 13.335,-57.335 13.8,-57.8 22.5,-57.8 23.495,-56.805 J1.6 J11.1 ; 13.509,-47.174 v1(21.374,-47.174) ; D6.2 v2(14.455,-10.145) v2@14.5,-10.1 ; v2@18.1,-10.2 v2(18.138,-10.238) D4.2 ; C15.2 23.351,-11.049 23.9,-10.5 v2(23.9,-10.3) ; v1@26.6,-31.6 v1(33.9,-31.6) ; C21.1 28.067,-53.867 28.575,-54.375 J11.1 ; v1@33,-50 v1(33.02,-50.02) R50.1 ; v1(35.25,-28.25) v1@35.3,-28.3 ; J11.4@36.322,-55.88 J11.4 ; C22.1 36.322,-54.078 36,-54.4 36,-55.812 J11.4 ; J11.1 28.575,-57.375 29,-57.8 35.7,-57.8 36.195,-57.305 J11.4
  Bottom Layer w1: v1(26.416,-28.25) v1(35.25,-28.25)
  Bottom Layer w2: J1.2 13.335,-50.127
  other v1: 44.831,-46.355 50.292,-43.434 44.831,-43.053 19.2,-42.2 40.8,-32.6 41.9,-32.6 40.8,-31.5 41.9,-31.5 53.086,-27.432 51.308,-26.416 40.576,-26.224 27.935,-18.035 51.435,-15.113 49.3,-15
  other v2: 24.1,11.4 48.2,15.8 50.3,15.8 52.3,15.8 35,15.9 43.5,15.9 29.5,16 39.6,16
H: LED1.3 R38.2 | length 2.3
  Bottom Layer w0.5: R38.2 33.655,6.115 LED1.3
IIC_SCL: R12.2 U2.35 | length 22.5
  Top Layer w0.254: v1(57.429,-21.996) U2.35 ; R12.2 60.071,-36.83 60.706,-36.195 v1(60.706,-34.544)
  Bottom Layer w0.254: v1(57.429,-21.996) 60.096,-21.996 60.687,-22.587 60.687,-34.525 v1(60.706,-34.544)
IIC_SDA: R13.2 U2.34 | length 22.4
  Top Layer w0.254: v1@58.166,-21.082 v1(58.217,-21.031) U2.34 ; v1(61.468,-33.528) 61.487,-33.547 61.487,-36.214 61.722,-36.449 R13.2
  Bottom Layer w0.254: v1(58.217,-21.031) 60.909,-21.031 61.468,-21.59 61.468,-24.13 v1(61.468,-33.528)
INDICATE_LED: J2.2 U2.9 | length 35.9
  Top Layer w0.254: J2.2 40.513,-6.604 39.878,-7.239 39.878,-23.122 38.6,-24.4 38.6,-28.5 39.564,-29.464 44.494,-29.464 46.373,-27.584 U2.9
KEY: J4.6 U2.14 | length 27.3
  Top Layer w0.254: v1(51.816,-36.957) 51.841,-36.932 U2.14@51.841,-31.471 ; U2.14@51.816,-31.496 U2.14@51.841,-31.471 ; U2.14 U2.14@51.841,-31.471
  Bottom Layer w0.254: v1(51.816,-36.957) 53.086,-36.957 53.721,-37.592 53.721,-39.751 54.229,-40.259 58.166,-40.259 58.674,-40.767 58.674,-43.374 60.845,-45.545 J4.6
NetBZ1_2: BZ1.2 Q1.3 | length 5
  Bottom Layer w0.5: BZ1.2 54.94,-10.49 55.438,-10.988 Q1.3
NetC1_1: C1.1 J1.1 J1.3 | length 11.8
  Top Layer w2: 10.795,-54.737 12.319,-53.213 14.478,-53.213 15.875,-54.61 J1.3
  Bottom Layer w1: J1.1 C1.1@10.795,-51.9
NetC5_1: C5.1 U1.1 | length 3.4
  Top Layer w0.5: U1.1 21.024,-40.328 21.59,-40.894 C5.1
NetC5_2: C5.2 D1.2 L1.1 U1.8 | length 17.8
  Top Layer w0.5: U1.8 19.87,-45.72 20.955,-45.72 21.59,-45.085 C5.2 26.239,-43.853 L1.1@26.531,-43.561
  Top Layer w3: L1.1 26.531,-43.561 26.531,-35.135 D1.2
NetC6_1: C6.1 C7.2 F1.1 L1.2 R2.1 TVS2.2 | length 44.8
  Top Layer w0.5: R2.1 v1(19.558,-36.83)
  Top Layer w1: C6.1@35.306,-34.29 C6.1@35.306,-33.528
  Top Layer w3: C6.1@35.306,-34.29 C6.1 35.306,-42.252 L1.2 ; L1.2@37.885,-44.323 F1.1@41.783,-44.323 ; F1.1@41.783,-44.45 F1.1@41.783,-44.323 ; TVS2.2@41.783,-36.322 F1.1@41.783,-44.323
  Bottom Layer w0.5: v1(19.558,-36.83) 19.558,-36.068 20.536,-35.09 v1(35.522,-35.09) ; v1@35.433,-35.179 v1(35.522,-35.09) ; C7.2 v1(35.522,-35.09)
NetC15_1: C15.1 J6.1 Q5.2 | length 12.9
  Top Layer w2: Q5.2 21.463,-13.737 21.463,-11 J6.1
  Bottom Layer w0.5: J6.1 21.59,-6.096 C15.1
NetC16_1: C16.1 J5.1 Q4.2 | length 13
  Top Layer w2: Q4.2 37.719,-13.229 J5.1
  Bottom Layer w0.5: C16.1 37.592,-6.096 J5.1
NetC17_1: C17.1 J8.1 Q8.2 | length 14.1
  Top Layer w2: J8.1 9.673,-24.765 Q8.2
  Bottom Layer w0.5: J8.1 6.02,-24.765 C17.1
NetC20_2: C20.2 Down.1 J9.6 OK.1 R40.1 Set.1 Up.1 | length 101.9
  Top Layer w0.5: OK.1 6.2,3.8 6.2,7.4 7.95,9.15 Set.1 7.95,14.65 9,15.7 15.8,15.7 17.35,17.25 17.8,17.7 v1(52.4,17.7)
  Bottom Layer w0.254: Up.1@55.4,13.3 cw(c55.45,13.3) Up.1 ccw(c55.45,13.3) Up.1@55.4,13.3 ; Down.1 ccw(c55.622,1.95) 55.622,1.778 cw(c55.622,1.95) Down.1
  Bottom Layer w0.5: v1@52.4,17.6 v1(52.4,17.7) ; v1@52.5,17.8 v1(52.4,17.7) ; Up.1@55.4,13.3 Up.1 55.4,13.4 55.4,15.4 ; Down.1 59.481,1.95 59.817,2.286 59.817,3.183 60.334,3.7 62.594,3.7 63.246,3.048 C20.2 64.389,3.086 R40.1 ; R40.1@64.351,5.042 R40.1 ; 64.433,7.033 J9.6 ; v1(52.4,17.7) 53.2,17.7 53.7,17.2 53.7,15.9 54.2,15.4 55.4,15.4 ; 55.4,15.4 63.3,15.4 64.389,14.311 R40.1
NetD2_1: D2.1 R4.1 | length 1.8
  Top Layer w1: D2.1 R4.1
NetD3_1: D3.1 R7.2 | length 1.7
  Top Layer w0.254: R7.2 D3.1
NetD4_1: D4.1 J6.2 R14.2 | length 5.3
  Bottom Layer w0.5: J6.2 18.138,-6.754 D4.1 19.515,-9.279 R14.2
NetD5_1: D5.1 J5.2 R17.2 | length 5
  Bottom Layer w0.5: D5.1 35.052,-9.152 ; J5.2 35.179,-9.025 35.052,-9.152 ; R17.2 35.771,-9.152 35.052,-9.152
NetD6_1: D6.1 J6.3 R15.2 | length 5.4
  Bottom Layer w0.5: D6.1 16.086,-9.279 R15.2 16.256,-6.045 J6.3
NetD7_1: D7.1 J5.3 R18.2 | length 5.1
  Bottom Layer w0.5: D7.1 32.496,-9.179 R18.2 32.639,-5.969 J5.3
NetD8_1: D8.1 J6.5 R16.2 | length 5.1
  Bottom Layer w0.5: J6.5 11.303,-9.129 D8.1 12.657,-9.279 R16.2
NetD9_1: D9.1 J5.5 R19.2 | length 4.9
  Bottom Layer w0.5: J5.5 27.79,-6.2 D9.1 29.167,-9.152 R19.2
NetD10_1: D10.1 J8.2 R29.2 | length 5.9
  Bottom Layer w0.5: J8.2 2.794,-26.67 R29.2 5.977,-26.84 D10.1
NetD11_1: D11.1 J8.3 R30.2 | length 5.7
  Bottom Layer w0.5: J8.3 R30.2@6.122,-29.87 ; D11.1 5.977,-30.015 R30.2@6.122,-29.87 ; R30.2 R30.2@6.122,-29.87
NetD12_1: D12.1 J8.5 R28.2 | length 5.5
  Bottom Layer w0.5: J8.5 2.39,-34.694 D12.1 5.977,-33.317 R28.2
NetD13_1: D13.1 Set.2 | length 3.8
  Bottom Layer w0.254: Set.2 10.852,17.85 11.247,17.455 D13.1
NetD14_1: D14.1 Up.2 | length 4.2
  Bottom Layer w0.254: Up.2 58.223,17.85 58.618,17.455 D14.1
NetD15_1: D15.1 Down.2 | length 3.3
  Bottom Layer w0.254: Down.2 58.698,6.45 D15.1@58.73,6.418
NetD16_1: D16.1 OK.2 | length 4.3
  Bottom Layer w0.254: OK.2 10.849,6.55 11.303,6.096 11.303,5.45 D16.1
NetD18_2: D18.2 J10.1 R41.1 | length 4.2
  Bottom Layer w0.5: J10.1@2.921,-13.462 R41.1 5.461,-11.804 D18.2
NetD19_2: D19.2 J10.2 R42.1 | length 4.6
  Bottom Layer w0.5: J10.2 2.921,-16.002 R42.1 5.477,-16.018 D19.2
NetJ1_5: J1.5 R1.2 | length 4.2
  Bottom Layer w1: J1.5 R1.2
NetJ2_1: J2.1 R9.1 | length 2.3
  Bottom Layer w0.254: R9.1@45.72,-8.89 J2.1
NetJ7_1: J7.1 Q9.3 R31.2 | length 14
  Bottom Layer w0.5: J7.1 46.99,-55.626 46.99,-54.229 47.498,-53.721 52.578,-53.721 54.178,-55.321 R31.2 56.591,-55.245 Q9.3
NetJ7_3: J7.3 Q9.2 | length 7
  Bottom Layer w0.5: J7.3 52.935,-56.745 Q9.2
NetJ9_1: J9.1 U6.1 U6.2 | length 47.7
  Bottom Layer w0.254: U6.2 26.289,17.78 26.67,18.161 26.67,19.05 ; U6.1 26.67,19.05 ; J9.1 67.564,18.669 66.833,19.4 28.3,19.4 27.95,19.05 26.67,19.05
NetJ9_2: J9.2 U6.8 | length 58.7
  Top Layer w0.254: v1(17.5,11.4) 17.302,11.4 17.272,11.43 17.5,11.658 17.5,15.8 18.4,16.7 53.9,16.7 54.3,16.3 62.396,16.3 63.663,15.033 J9.2
  Bottom Layer w0.254: v1(17.5,11.4) 17.302,11.4 17.272,11.43 U6.8
NetJ9_3: J9.3 U6.9 | length 56.2
  Top Layer w0.254: v1(18.288,12.7) 27.305,12.7 27.813,12.192 31.496,12.192 33.001,10.687 46.755,10.687 47.371,11.303 47.371,14.478 47.879,14.986 62.992,14.986 64.945,13.033 J9.3
  Bottom Layer w0.254: v1(18.288,12.7) U6.9
NetJ9_4: J9.4 U5.15 | length 59.7
  Top Layer w0.254: v1(18.288,8.636) 46.964,8.636 48.006,7.594 48.006,5.207 48.768,4.445 57.658,4.445 58.42,5.207 58.42,10.16 59.293,11.033 J9.4
  Bottom Layer w0.254: v1(18.288,8.636) U5.15
NetJ9_5: J9.5 U5.14 | length 61.1
  Top Layer w0.254: v1(17.145,7.112) 17.833,7.8 46.7,7.8 47.371,7.129 47.371,4.826 48.387,3.81 58.039,3.81 58.928,4.699 58.928,8.382 59.579,9.033 J9.5
  Bottom Layer w0.254: v1@17.145,6.985 v1(17.145,7.112) 17.399,7.366 U5.14
NetJ11_2: J11.2 R45.1 R48.1 | length 4.5
  Bottom Layer w0.5: R48.1 R45.1 31.369,-54.031 31.1,-54.3 31.1,-55.992 J11.2
NetJ11_3: J11.3 R49.1 R50.2 | length 4.6
  Bottom Layer w0.5: J11.3 33.655,-54.655 33.02,-54.02 R50.2 R49.1@34.595,-53.289
NetJ11_5: J11.5 R46.1 R47.1 | length 4.7
  Bottom Layer w0.5: J11.5 38.735,-54.835 37.973,-54.073 R47.1 R46.1
NetJ11_6: J11.6 R44.1 | length 2.8
  Bottom Layer w0.5: J11.6 R44.1
NetL2_2: L2.2 U2.12 | length 2.8
  Top Layer w0.254: L2.2@50.241,-34.214 U2.12
NetQ2_3: Q2.3 R21.1 | length 1.9
  Top Layer w0.5: R21.1@26.924,-17.145 26.924,-18.798 Q2.3@27.112,-18.986
NetQ3_3: Q3.3 R23.1 | length 1.9
  Top Layer w0.5: R23.1@10.922,-17.145 10.922,-18.925 Q3.3
NetQ4_1: Q4.1 R20.2 R21.2 | length 13.3
  Top Layer w0.5: R20.2 26.924,-15.245 28.199,-15.245 28.956,-16.002 28.956,-19.558 29.972,-20.574 33.676,-20.574 Q4.1
NetQ5_1: Q5.1 R22.1 R23.2 | length 20.4
  Top Layer w0.5: v1(10.922,-20.193) 9.906,-20.193 9.144,-19.431 9.144,-15.875 9.774,-15.245 10.922,-15.245 R22.1 ; Q5.1 18.055,-20.701 v1(19.685,-20.701)
  Bottom Layer w0.5: v1(10.922,-20.193) 11.43,-20.701 v1(19.685,-20.701)
NetQ6_3: Q6.3 R25.1 | length 4.5
  Bottom Layer w0.5: Q6.3 51.94,-43.434 53.086,-43.434 53.467,-43.053 53.467,-42.037 53.975,-41.529 R25.1
NetQ7_3: Q7.3 R27.1 | length 1.7
  Top Layer w0.5: R27.1@13.335,-34.925 14.983,-34.925 Q7.3
NetQ8_1: Q8.1 R26.2 R27.2 | length 13.5
  Top Layer w0.5: R26.2 11.435,-34.925 11.435,-33.269 11.938,-32.766 16.891,-32.766 17.145,-32.512 17.145,-28.935 Q8.1
NetQ9_1: Q9.1 U4.3 | length 9.1
  Top Layer w0.5: U4.3 52.324,-52.324 53.745,-53.745 Q9.1
NetR10_2: R10.2 R12.1 U3.6 | length 3.8
  Top Layer w0.5: R10.2 60.198,-41.859 R12.1@60.198,-39.878 ; U3.6 R10.2@60.33,-42.093
NetR11_2: R11.2 R13.1 U3.5 | length 4.1
  Top Layer w0.5: U3.5 61.6,-42.083 61.722,-41.961 R13.1 ; R11.2 R11.2@61.849,-41.834
NetR25_2: R25.2 U4.1 | length 2.6
  Top Layer w0.5: U4.1 54.94,-43.129 v1(56.21,-43.129)
  Bottom Layer w0.5: R25.2 v1(56.21,-43.129)
NetR31_1: R31.1 U4.4 | length 4.9
  Top Layer w0.5: U4.4 54.864,-51.816 55.499,-52.451 v1(56.515,-52.451)
  Bottom Layer w0.5: R31.1 v1(56.515,-52.451)
NetR32_1: R32.1 U6.3 | length 12.1
  Top Layer w0.254: v1(27.699,10.782) 30.62,10.782 v1(31.115,10.287) v1@31.242,10.287
  Bottom Layer w0.254: U6.3 26.924,16.51 27.686,15.748 27.686,14.233 27.669,14.216 27.669,10.812 v1(27.699,10.782) ; R32.1@30.988,10.414 v1(31.115,10.287)
NetR33_1: R33.1 U6.4 | length 20.6
  Top Layer w0.254: v1(26.67,11.684) 31.242,11.684 33.02,9.906 v1(41.402,9.906)
  Bottom Layer w0.254: U6.4 26.162,15.24 26.67,14.732 v1(26.67,11.684)
NetR34_1: R34.1 U6.5 | length 32.8
  Top Layer w0.254: v1(23.368,13.97) 26.797,13.97 28.067,12.7 31.706,12.7 32.976,11.43 39.624,11.43 v1(39.878,11.684) ; v1(36.322,2.032) 36.322,2.54 36.764,2.982 v1(39.96,2.982)
  Bottom Layer w0.254: v1@23.114,13.97 v1(23.368,13.97) U6.5 ; v1@39.693,2.863 39.841,2.863 v1(39.96,2.982) 39.878,3.064 v1(39.878,11.684)
NetR35_1: R35.1 U6.6 | length 21.2
  Top Layer w0.254: v2(23.16,4.225) 28.925,4.225 v1(29.8,5.1)
  Bottom Layer w0.254: v2@23.114,4.271 23.114,12.446 23.368,12.7 U6.6 ; v1(29.8,5.1) 29.8,2.3 30.068,2.032 R35.1
NetR36_1: R36.1 U6.10 | length 20.3
  Top Layer w0.254: v1@22.098,2.159 22.352,1.905 v1(26.67,1.905)
  Bottom Layer w0.254: U6.10 21.209,13.97 21.463,13.716 21.463,2.286 v1(21.844,1.905) ; v1(26.67,1.905) 28.448,1.905 R36.1
NetR37_1: R37.1 U6.12 | length 34.5
  Top Layer w0.254: v1(22.86,1.016) v1(38.608,1.016)
  Bottom Layer w0.254: U6.12 21.336,16.51 21.971,15.875 21.971,2.959 22.537,2.394 22.644,2.394 22.86,2.178 v1(22.86,1.016) ; v1(38.608,1.016) 38.608,1.905 R37.1
NetR38_1: R38.1 U6.13 | length 28.1
  Top Layer w0.254: v1(22.86,3.175) 22.86,3.302 23.476,2.686 26.993,2.686 ; 27.013,2.667 33.147,2.667 v1@33.528,2.286
  Bottom Layer w0.254: U6.13 21.717,17.78 22.479,17.018 22.479,16.383 22.479,3.683 22.86,3.302 v1(22.86,3.175)
  other v1: 33.655,2.032
NetR39_1: R39.1 U6.11 | length 22.2
  Top Layer w0.254: v1(18.288,15.24) v1@32.131,15.24
  Bottom Layer w0.254: v1(18.288,15.24) U6.11 ; v1(32.258,15.24) 32.385,15.113 32.385,14.351 ; 32.385,14.732 32.385,14.351 ; R39.1@33.655,10.033 32.639,10.033 32.385,10.287 32.385,14.351
NetR43_1: R43.1 R44.2 | length 1.6
  Bottom Layer w0.5: R44.2 R43.1
OSC_IN: C8.1 U2.2 X1.2 | length 8.9
  Top Layer w0.254: C8.1 43.639,-19.774 X1.2 43.688,-21.336 44.348,-21.996 U2.2@47.879,-21.996
OSC_OUT: C9.1 U2.3 X1.1 | length 8.6
  Top Layer w0.254: C9.1 43.639,-24.676 X1.1 43.688,-23.368 44.247,-22.809 U2.3@47.879,-22.809
POWER_ROLLER: Q7.1 U2.21 | length 62.5
  Top Layer w0.254: Q7.1 17.399,-35.301 17.648,-35.052 v1(18.669,-35.052) ; v1@57.277,-36.068 57.429,-35.916 U2.21
  Bottom Layer w0.254: v1(18.669,-35.052) 19.177,-35.052 20.193,-34.036 35.179,-34.036 37.211,-32.004 37.211,-26.289 38.1,-25.4 46.526,-25.4 47.117,-25.991 47.117,-35.052 48.133,-36.068 v1(57.404,-36.068)
POWER_TURN: Q2.1 U2.39 | length 37
  Top Layer w0.254: Q2.1 v1(26.035,-20.193) v1@26.162,-20.066 ; v1(53.213,-25.019) 53.213,-23.495 54.248,-22.46 54.248,-18.993 U2.39
  Bottom Layer w0.254: v1(26.035,-20.193) 45.811,-20.193 50.419,-24.801 50.419,-24.819 50.619,-25.019 v1(53.213,-25.019)
POWER_VIBRA: Q3.1 U2.24 | length 57.7
  Top Layer w0.254: v1(8.89,-21.336) Q3.1 ; v1@58.039,-28.829 v1(58.039,-28.702) 58.344,-28.397 U2.24
  Bottom Layer w0.254: v1(8.89,-21.336) 9.271,-21.717 46.617,-21.717 49.911,-25.011 49.911,-27.94 50.673,-28.702 v1(58.039,-28.702)
PWM_ROLLER: R30.1 U2.19 | length 66.2
  Top Layer w0.254: U2.19 55.829,-34.163 v1(55.88,-34.163)
  Bottom Layer w0.254: R30.1 35.179,-29.845 36.195,-28.829 36.195,-23.622 36.957,-22.86 45.86,-22.86 48.133,-25.133 48.133,-33.147 49.149,-34.163 v1(55.88,-34.163)
PWM_TURN: R18.1 U2.41 | length 33.3
  Top Layer w0.254: v1@52.5,-21.5 52.5,-21.639 52.578,-21.717 52.629,-21.666 52.629,-21.233 52.619,-21.223 52.619,-18.984 U2.41
  Bottom Layer w0.254: R18.1 32.639,-12.192 33.401,-12.954 52.07,-12.954 52.578,-13.462 52.578,-21.717 52.5,-21.639 v1@52.5,-21.5
  other v1: 52.5,-21.6
PWM_VIBRA: R15.1 U2.26 | length 57.4
  Top Layer w0.254: v1(55.499,-26.797) 55.518,-26.816 60.433,-26.816 U2.26
  Bottom Layer w0.254: R15.1 16.256,-14.097 16.764,-14.605 47.161,-14.605 48.006,-15.45 48.006,-20.924 50.39,-23.308 54.931,-23.308 55.499,-23.876 v1(55.499,-26.797)
RELAY: Q6.1 R24.2 U2.10 | length 23.3
  Top Layer w0.254: v3@44.577,-40.894 44.704,-40.767 44.704,-29.972 46.279,-28.397 U2.10 ; v3(44.704,-40.894) v3@45.085,-40.894
  Bottom Layer w0.254: v3@44.704,-40.843 Q6.1@50.927,-40.843
  Bottom Layer w0.5: Q6.1 51.105,-40.843 R24.2 R24.2@50.927,-39.497
SENSOR: C21.2 R48.2 U2.15 | length 48.9
  Top Layer w0.254: v1(26.416,-52.832) 33.668,-52.832 36.081,-50.419 47.371,-50.419 48.514,-49.276 48.514,-39.116 49.53,-38.1 52.324,-38.1 52.629,-37.795 U2.15
  Bottom Layer w0.5: v1(26.416,-52.832) 26.416,-52.197 26.962,-51.651 C21.2 R48.2
SPI_CLK: J4.2 U2.27 | length 17.8
  Top Layer w0.254: U2.27 62.56,-25.984 63.246,-26.67 63.246,-37.211 v1(63.58,-37.545)
  Bottom Layer w0.254: v1(63.58,-37.545) J4.2 J4.2@67.136,-37.592
SPI_CS: J4.3 U2.23 | length 16.3
  Top Layer w0.254: U2.23 62.332,-29.185 62.738,-29.591 62.738,-38.989 62.992,-39.243 v1@63.294,-39.545
  Bottom Layer w0.254: v1(63.5,-39.545) J4.3
SPI_MISO: U2.31
SPI_MOSI: J4.1 U2.30 | length 23.6
  Top Layer w0.254: v1@57.658,-23.495 v1(57.76,-23.597) U2.30
  Bottom Layer w0.254: v1(57.76,-23.597) 59.411,-23.597 59.836,-24.022 59.836,-34.944 60.437,-35.545 J4.1
SWIM: J3.1 U2.38 | length 18.9
  Top Layer w0.254: U2.38 55.016,-15.215 55.372,-14.859 62.357,-14.859 62.738,-14.478 62.738,-13.335 63.119,-12.954 68.326,-12.954 J3.1
TEST: D3.2 U2.11 | length 6.7
  Top Layer w0.254: D3.2 45.593,-29.845 46.253,-29.185 U2.11
UART2_RX: R42.2 U2.43 | length 46.1
  Top Layer w0.254: v1(46.228,-17.145) 50.673,-17.145 51.029,-17.501 U2.43
  Bottom Layer w0.254: R42.2 7.188,-16.129 45.085,-16.129 46.101,-17.145 v1(46.228,-17.145)
UART2_TX: R41.2 U2.42 | length 49.6
  Top Layer w0.254: v1(46.228,-16.002) 51.435,-16.002 51.841,-16.408 U2.42 51.841,-18.059 U2.42@51.816,-18.034
  Bottom Layer w0.254: R41.2 11.049,-13.462 13.208,-15.621 45.72,-15.621 v1@46.228,-16.129
V0: D13.2 LED1.12 U5.1 | length 28.7
  Top Layer w0.254: v1(11.237,13.396) 11.237,10.734 12.065,9.906 v1(28.448,9.906)
  Bottom Layer w0.254: v1(11.237,13.396) D13.2 ; U5.1 v1(28.448,9.906) 28.575,10.033 28.575,13.735 LED1.12
V1: D15.2 LED1.9 U5.2 | length 50.5
  Top Layer w0.254: LED1.9 36.27,14.68 36.576,14.986 45.085,14.986 45.466,14.605 v1(45.466,13.716)
  Bottom Layer w0.254: U5.2 35.306,8.636 36.27,9.6 LED1.9 ; v1(45.466,13.716) 45.466,3.937 45.912,3.491 D15.2
V2: D14.2 LED1.8 U5.3 | length 45.8
  Bottom Layer w0.254: U5.3 37.846,7.366 38.81,8.33 LED1.8 38.81,14.61 39.2,15 53.2,15 53.7,14.5 53.7,11.8 54.1,11.4 58.1,11.4 58.608,11.908 D14.2
V3: D16.2 LED1.6 U5.4 | length 36.7
  Top Layer w0.254: v1(11.237,3.495) 16.51,3.495 17.018,4.003 17.018,5.461 17.653,6.096 v1(26.543,6.096) 26.543,6.835 27,7.292 40.908,7.292 41.35,6.85 LED1.6
  Bottom Layer w0.254: D16.2 v1(11.237,3.495) ; U5.4 v1(26.543,6.096)
VCAP: C11.1 U2.6 | length 6.4
  Top Layer w0.254: C11.1@44.031,-27.813 C11.1 44.983,-27.788 45.202,-27.569 45.202,-25.41 45.415,-25.197 U2.6
VCC_5V: C18.1 C19.1 J9.7 R40.2 U5.16 U6.14 | length 83.6
  Top Layer w0.5: v1(16.188,19.088) 45.912,19.088 v2(46.4,18.6) ; v1(46.3,11.6) 46.37,11.67 46.37,15.77 v2(46.4,15.8) ; v1@60.325,4.953 v1(60.332,4.946) 67.477,4.946 J9.7
  Bottom Layer w0.254: v1@16.1,18.8 16.1,10.3 16.494,9.906 U5.16 ; v1@16.1,19.1 16.1,19 v1(16.188,19.088) C19.1 ; C19.1@17.645,19.05 U6.14 U6.14@19.85,19.088 ; R40.2 ccw(c66.036,5.08) 66.036,5.033 J9.7
  Bottom Layer w0.5: v2(46.4,15.8) v2(46.4,18.6) ; v1(60.332,4.946) 46.854,4.946 46.3,5.5 v1(46.3,11.6) ; v1(46.3,11.6) 46.2,11.7 46.2,11.6 v1(46.3,11.6)
VIN: C2.1 C3.2 C4.2 J1.4 Q4.3 Q5.3 Q8.3 R20.1 R22.2 R26.1 TVS1.2 U1.7 | length 122
  Top Layer w1: R26.1 7.747,-49.149 8.001,-49.403 ; R22.2 13.081,-11.557 14.224,-12.7 14.224,-19.924 17.251,-22.951 Q8.3@17.251,-23.855 ; Q8.3 Q8.3@17.251,-23.855 ; Q8.3@17.653,-24.257 Q8.3@17.251,-23.855 ; 18.542,-48.006 U1.7 ; Q5.3 23.516,-20.68 25.019,-19.177 25.019,-12.319 25.781,-11.557 R20.1
  Top Layer w2: Q8.3 17.653,-24.257 22.606,-24.257 ; J1.4 18.415,-50.927 ; 18.415,-49.403 18.415,-50.927 ; Q5.3 22.606,-24.257 ; Q4.3 38.354,-22.098 36.195,-24.257 30.988,-24.257 ; 18.415,-50.927 29.083,-50.927 30.988,-49.022 30.988,-24.257 ; 22.606,-24.257 30.988,-24.257
  Bottom Layer w1: J1.4 C3.2@18.415,-51.854
VSENSE: R2.2 R3.2 U1.4 | length 3.9
  Top Layer w0.5: U1.4 R3.2@16.002,-38.303 ; R3.2 R2.2
pads on no net: Down.3 Down.4 J7.2 OK.3 OK.4 Set.3 Set.4 U1.2 U1.3 U1.5 U5.5 U5.6 U5.7 U5.9 U5.10 U5.11 Up.3 Up.4

## Polygon pours and split planes (outlines as drawn)
GND on Top Layer "GND" (solid, remove dead copper): 0.584,-0.025 cw(c0.644,-0.025) 0.644,0.034 69.367,0.034 ccw(c69.367,0.669) 70.002,0.669 70.002,19.406 ccw(c69.444,19.406) 69.444,19.964 69.367,19.964 0.737,19.964 0.515,19.964 ccw(c0.515,19.449) 0,19.449 0,0.559 ccw(c0.584,0.559) 0.584,-0.025
GND on Top Layer "GND" (solid, remove dead copper): 0,-4.817 cw(c1.041,-4.817) 1.041,-3.776 69.026,-3.776 cw(c69.026,-4.75) 70,-4.75 70,-58.143 cw(c69.367,-58.143) 69.367,-58.776 0.762,-58.776 cw(c0.762,-58.014) 0,-58.014 0,-4.817
GND on Bottom Layer "GND" (solid, remove dead copper): 0.5,0 cw(c0.5,0.5) 0,0.5 0,0.7 0,19.6 cw(c0.4,19.6) 0.4,20 0.6,20 ccw(c0.636,20) 0.636,19.964 69.444,19.964 cw(c69.444,19.406) 70.002,19.406 70.002,19.2 70.002,0.669 cw(c69.367,0.669) 69.367,0.034 cw(c69.333,0.034) 69.333,0 0.5,0
GND on Bottom Layer "GND" (solid, remove dead copper): 0.762,-58.776 cw(c0.762,-58.014) 0,-58.014 0,-4.817 cw(c1.041,-4.817) 1.041,-3.776 69.026,-3.776 cw(c69.026,-4.75) 70,-4.75 70,-58.143 cw(c69.367,-58.143) 69.367,-58.776 0.762,-58.776

## Keep-outs
Keep-Out Layer:
  lines w0.15: 0,-57.506 0,-58.014 ; 13.462,-1.702 13.462,-3.191 ccw(c14.046,-3.191) 14.046,-3.776 47.727,-3.776 ; 13.462,-1.676 13.462,-1.032 cw(c14.529,-1.032) 14.529,0.034 55.956,0.034 cw(c55.956,-0.575) 56.566,-0.575 56.566,-0.838 56.566,-3.353 cw(c56.143,-3.353) 56.143,-3.776 54.305,-3.776 46.457,-3.776 ; 59.03,-3.785 cw(c59.03,-3.175) 58.42,-3.175 58.42,-0.965 58.42,-0.728 cw(c59.182,-0.728) 59.182,0.034 68.732,0.034 69.367,0.034 ccw(c69.367,0.669) 70.002,0.669 70.002,1.067 70.002,1.753 70.002,19.406 ccw(c69.977,19.406) 69.977,19.431 ccw(c69.444,19.431) 69.444,19.964 69.367,19.964 2.007,19.964 0.737,19.964 0.515,19.964 ccw(c0.515,19.449) 0,19.449 0,4.115 0,0.914 0,0.559 ccw(c0.584,0.559) 0.584,-0.025 8.966,-0.025 10.719,-0.025 10.77,-0.025 cw(c10.77,-0.66) 11.405,-0.66 11.405,-3.023 cw(c10.652,-3.023) 10.652,-3.776 9.982,-3.776 1.041,-3.776 ccw(c1.041,-4.817) 0,-4.817 0,-58.014 ; 59.039,-3.776 69.026,-3.776 cw(c69.026,-4.75) 70,-4.75 70,-58.143 cw(c69.367,-58.143) 69.367,-58.776 0.762,-58.776 cw(c0.762,-58.014) 0,-58.014

## Other copper
Top Layer:
  rectangle net GND: 17.7,-34.3 24.2,-29.9
  rectangle net GND: 19.1,-32.8 28.3,-26.6
  rectangle net GND: 15,-37.4 16.5,-35.9
  rectangle net GND: 10.3,-41.8 15,-35.9
  rectangle net GND: 10.3,-44.3 17.1,-41.8
  rectangle net NetC5_2: 20.066,-46.482 28.321,-43.18
  rectangle net NetC1_1: 9.779,-52.324 16.891,-50.8
  rectangle net VIN: 4.699,-49.911 15.875,-48.768
  rectangle net NetC1_1: 14.732,-56.769 16.891,-50.927
  rectangle net NetC1_1: 9.779,-56.896 11.811,-50.8
  rectangle net VIN: 4.191,-49.911 20.32,-46.99
Bottom Layer:
  rectangle net GND: 19.9,-47.2 39.3,-37.9
  rectangle net GND: 39,-47.3 42.4,-31
  rectangle net GND: 7.1,-38.6 17.5,-34.3
  rectangle net GND: 3.5,-50.7 19.9,-37.9

## Dimensions
70.002,19.406 to 0,19.449 on Top Overlay
0.737,19.964 to 0.762,-58.776 on Top Overlay

## Text inside footprints (layer, text, board x,y; h text height)
C2: Mechanical 8 "1" at 4.953,-48.331 h1.2 r90; Mechanical 8 "2" at 4.953,-41.331 h1.2 r90
C6: Mechanical 8 "1" at 35.56,-35.25 h1.2 r90; Mechanical 8 "2" at 35.56,-28.25 h1.2 r90
LED1: Top Overlay "7" at 42.62,13.048 h1.2; Top Overlay "12" at 25.856,13.175 h1.2; Top Overlay "1" at 26.491,5.555 h1.2; Top Overlay "6" at 42.493,5.555 h1.2